# Altium PCB MSP430MCU1.PcbDoc
Units mil, origin at the board's own origin, x right, y up, seen from the top; angles counter-clockwise.
Board outline 6000 x 4000 mil, 2 copper layers (Top Layer, Bottom Layer); 1 components, 0 nets, 80 pads, 0 vias.
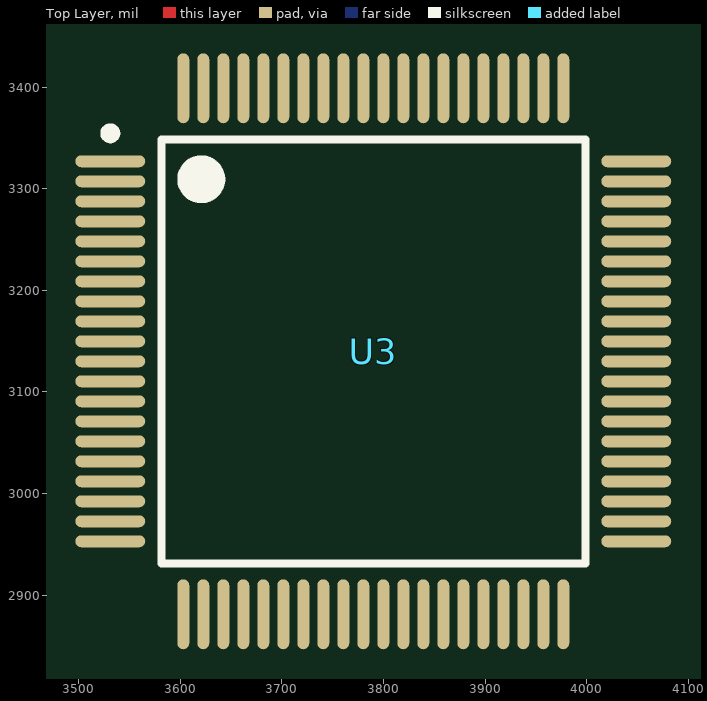
[diagram p0: Top Layer view]
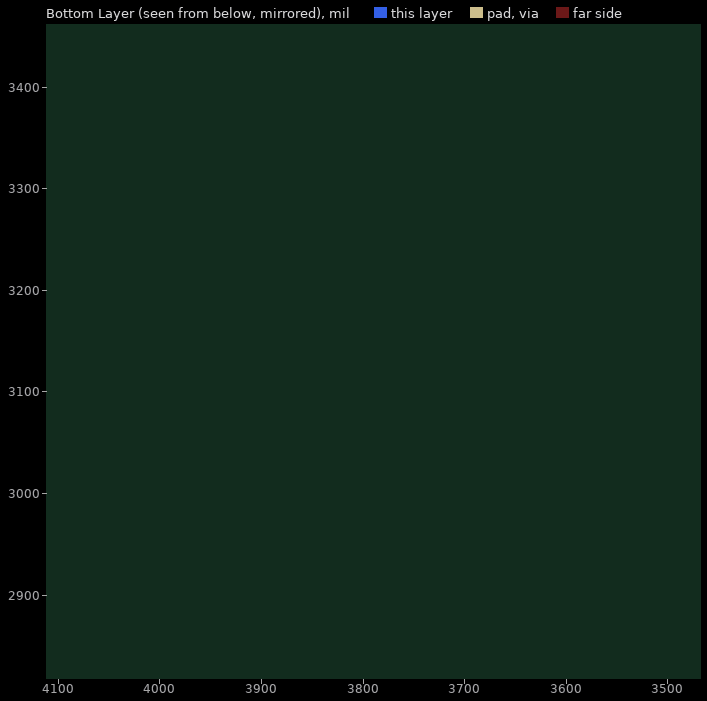
[diagram p1: Bottom Layer view, seen from below]

## Layer stack, top to bottom
Top Solder: solder mask 0.4, Solder Resist, Dk 3.5
Top Layer: signal copper 1.4
Dielectric 1: dielectric 12.6, FR-4, Dk 4.8
Bottom Layer: signal copper 1.4
Bottom Solder: solder mask 0.4, Solder Resist, Dk 3.5

## Board outline
1000,1000 7000,1000 7000,5000 1000,5000

## Design rules (kind name [scope] priority, off if disabled: settings)
Clearance [All] p1: gap=10
PolygonConnect [All] p1: connectstyle=Relief reliefconductorwidth=10 reliefentries=4 polygonreliefangle="90 Angle" airgapwidth=10
RoutingVias [All] p1: holewidth=28 width=50 viastyle="Through Hole" minholewidth=28 minwidth=50 maxholewidth=28 maxwidth=50
SolderMaskExpansion [All] p1: expansion=4
Width [All] p1: maxlimit=10 minlimit=10 preferedwidth=10
30 further rules are at their usual default settings.

## Components (designator, comment, footprint, x,y, rotation, side; value= is the part's Value field where it differs from the comment)
U3 "MSP430F5515IPN" TI-PN80_N 3790,3140 r0 top

## Footprints (in the part's own frame and the unit in brackets; to place one, negate y for a bottom-side part, rotate by r counter-clockwise, add the part's x,y. Pads: shape width x height; smd on the part's side, far side on the other; paste and mask are expansions set on the pad)
TI-PN80_N [mm] "QFP, 80-Leads, Body 12x12mm, Pitch 0.5mm, IPC Medium Density"
  oval 1.75x0.3 smd: 1(-6.575,4.75) 2(-6.575,4.25) 3(-6.575,3.75) 4(-6.575,3.25) 5(-6.575,2.75) 6(-6.575,2.25) 7(-6.575,1.75) 8(-6.575,1.25) 9(-6.575,0.75) 10(-6.575,0.25) 11(-6.575,-0.25) 12(-6.575,-0.75) 13(-6.575,-1.25) 14(-6.575,-1.75) 15(-6.575,-2.25) 16(-6.575,-2.75) 17(-6.575,-3.25) 18(-6.575,-3.75) 19(-6.575,-4.25) 20(-6.575,-4.75) 41(6.575,-4.75) 42(6.575,-4.25) 43(6.575,-3.75) 44(6.575,-3.25) 45(6.575,-2.75) 46(6.575,-2.25) 47(6.575,-1.75) 48(6.575,-1.25) 49(6.575,-0.75) 50(6.575,-0.25) 51(6.575,0.25) 52(6.575,0.75) 53(6.575,1.25) 54(6.575,1.75) 55(6.575,2.25) 56(6.575,2.75) 57(6.575,3.25) 58(6.575,3.75) 59(6.575,4.25) 60(6.575,4.75)
  oval 0.3x1.75 smd: 21(-4.75,-6.575) 22(-4.25,-6.575) 23(-3.75,-6.575) 24(-3.25,-6.575) 25(-2.75,-6.575) 26(-2.25,-6.575) 27(-1.75,-6.575) 28(-1.25,-6.575) 29(-0.75,-6.575) 30(-0.25,-6.575) 31(0.25,-6.575) 32(0.75,-6.575) 33(1.25,-6.575) 34(1.75,-6.575) 35(2.25,-6.575) 36(2.75,-6.575) 37(3.25,-6.575) 38(3.75,-6.575) 39(4.25,-6.575) 40(4.75,-6.575) 61(4.75,6.575) 62(4.25,6.575) 63(3.75,6.575) 64(3.25,6.575) 65(2.75,6.575) 66(2.25,6.575) 67(1.75,6.575) 68(1.25,6.575) 69(0.75,6.575) 70(0.25,6.575) 71(-0.25,6.575) 72(-0.75,6.575) 73(-1.25,6.575) 74(-1.75,6.575) 75(-2.25,6.575) 76(-2.75,6.575) 77(-3.25,6.575) 78(-3.75,6.575) 79(-4.25,6.575) 80(-4.75,6.575)
  silkscreen extent -6.7,-5.3 5.3,5.57, body extent -6,-6 6,6, height 1.6

## Part data
U3: "25 MHz Mixed Signal Microcontroller with 64 KB Flash, 4096 B SRAM and 63 GPIOs, -40 to 85 degC, 80-pin QFP (PN), Green (RoHS & no Sb/Br)"

## Nets (pads, with @x,y where several pads share a name; then routed paths per layer and width w, separated by ;. In a path a pad name is that pad's centre, name@x,y a point inside that pad or via, vN(x,y) a via of type N, cw(c..) or ccw(c..) an arc to the next point about the centre after c; other vN are vias at no path point)
pads on no net: U3.1 U3.2 U3.3 U3.4 U3.5 U3.6 U3.7 U3.8 U3.9 U3.10 U3.11 U3.12 U3.13 U3.14 U3.15 U3.16 U3.17 U3.18 U3.19 U3.20 U3.21 U3.22 U3.23 U3.24 U3.25 U3.26 U3.27 U3.28 U3.29 U3.30 U3.31 U3.32 U3.33 U3.34 U3.35 U3.36 U3.37 U3.38 U3.39 U3.40 U3.41 U3.42 U3.43 U3.44 U3.45 U3.46 U3.47 U3.48 U3.49 U3.50 U3.51 U3.52 U3.53 U3.54 U3.55 U3.56 U3.57 U3.58 U3.59 U3.60 U3.61 U3.62 U3.63 U3.64 U3.65 U3.66 U3.67 U3.68 U3.69 U3.70 U3.71 U3.72 U3.73 U3.74 U3.75 U3.76 U3.77 U3.78 U3.79 U3.80